# EAGLE board CS3_Schnittstelle_REV0100 (EAGLE 9.5.1)
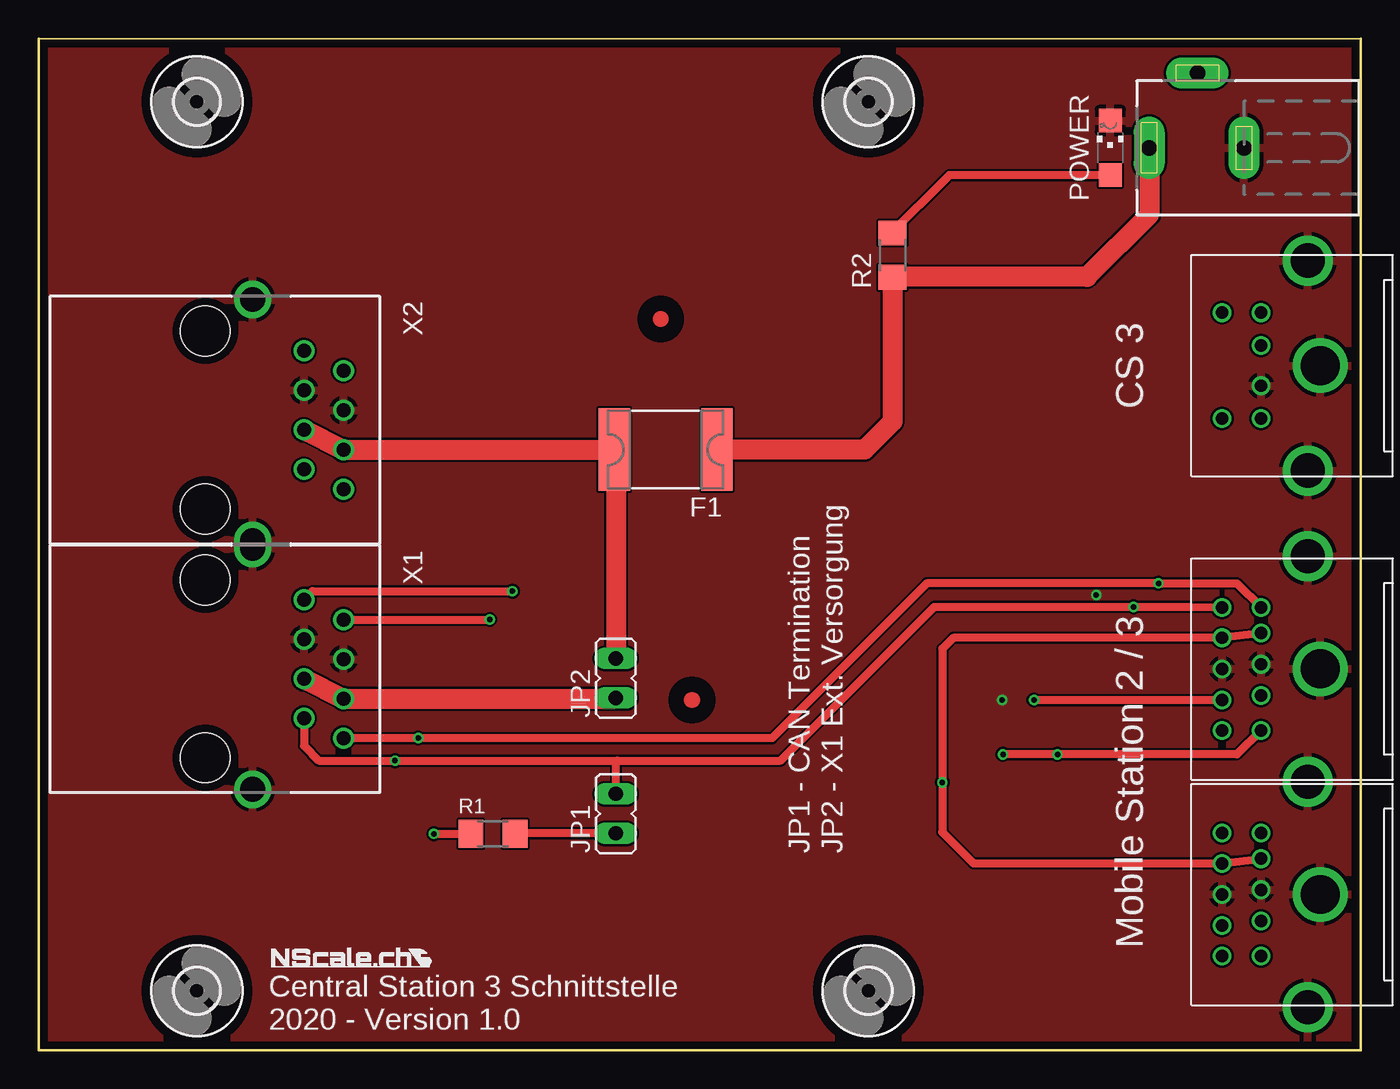
[diagram p0: board, top side]
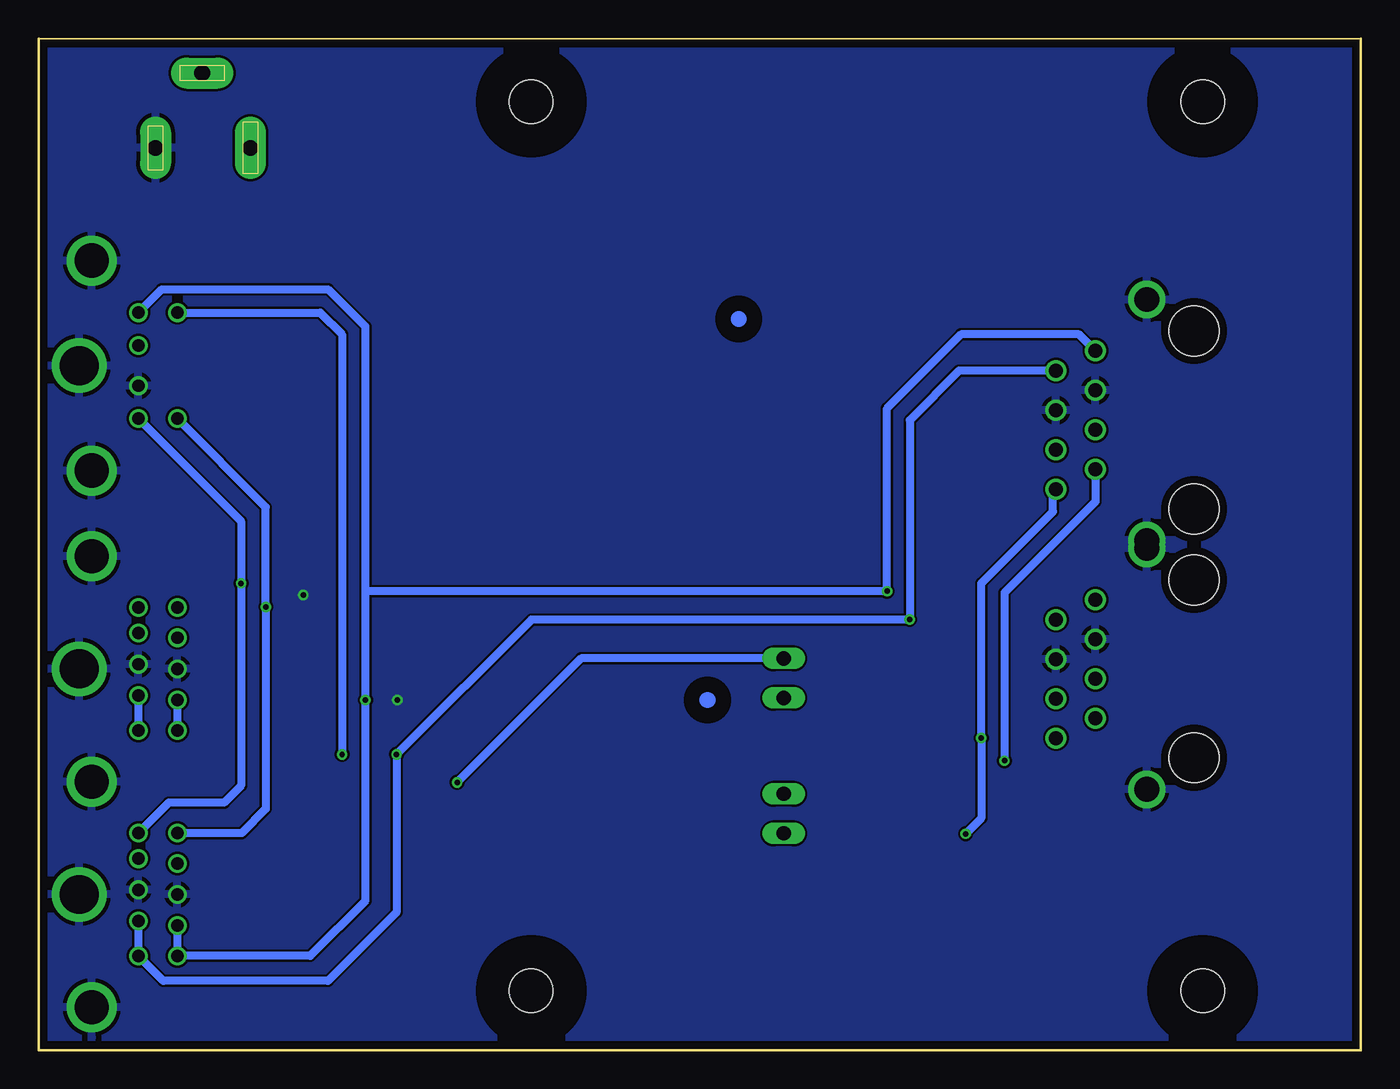
[diagram p1: board, bottom side, seen from below]

Size 85 x 65 mm. Coordinates in mm from the lower left corner, seen from the top.
Outline: 0,0 85,0 85,65 0,65 0,0
Copper layers (1*16): Top 0.035mm / dielectric 1.6mm / Bottom 0.035mm
Design rules "Elecrow_2-layer_PCB_eagle_rule": minimum track width 6mil, minimum drill 12mil, track to track 6mil, track to pad 6mil, pad to pad 6mil, via to via 8mil, smd to smd 0mil, copper to edge 20mil, drill to drill 10mil, minimum pad ring 6mil, minimum via ring 6mil, stop-mask expansion 0mil, vias tented up to drill 100mil, thermal gap 10mil

## Footprints (pad centres in the part's own frame; a part is rotated, then mirrored left to right if it is on the bottom)
2920L = smd 2 x 5.3: 1 -3.3,0; 2 3.3,0
2,8 = hole 2.8: 0,0
DCJ0202 = drill 1 pad 2 long: 1 0,3.1; 2 4.8,0; 3 0,-3
JP1 = drill 0.914 long: 1 0,-1.27; 2 0,1.27
CHIPLED_1206 = smd 1.5 x 1.5: A 0,-1.75; C 0,1.75
R1206 = smd 1.6 x 1.803: 1 -1.422,0; 2 1.422,0
XRJF-01A-0-D2A-010 = drill 0.9 pad 1.27: 1 -4.445,6.35; 2 -3.175,8.89; 3 -1.905,6.35; 4 -0.635,8.89; 5 0.635,6.35; 6 1.905,8.89; 7 3.175,6.35; 8 4.445,8.89 | drill 1.6 pad 2.184: S1 -7.745,3.05; S2 7.745,3.05 | hole 3.2: -5.715,0; 5.715,0
MARKLIN-MD-6-PRINT = drill 0.8 pad 1.1: 1 -1.3,-2; 2 1.3,-2; 3 -3.4,-2; 4 3.4,-2; 5 -3.4,-4.5; 6 3.4,-4.5 | drill 2.5 pad 2.8: GND1 0,1.8 | drill 2.2 pad 2.5: GND2 6.75,1; GND3 -6.75,1
MARKLIN-MD-10-PRINT = drill 0.8 pad 1.1: 1 -2.3,-2; 2 -0.3,-2; 3 3.95,-2; 4 -3.95,-2; 5 -2,-4.5; 6 0,-4.5; 7 1.7,-2; 8 -3.95,-4.5; 9 2,-4.5; 10 3.95,-4.5 | drill 2.5 pad 2.8: GND1 0,1.8 | drill 2.2 pad 2.5: GND2 7.25,1; GND3 -7.25,1

## Placement (x,y rotation side)
F1  Fuse 2A  [2920L]  40.3,38.6 180 top
H1  MOUNT-HOLE2.8  [2,8]  10.16,60.96 0 top
H2  MOUNT-HOLE2.8  [2,8]  53.34,60.96 0 top
H3  MOUNT-HOLE2.8  [2,8]  10.16,3.81 0 top
H4  MOUNT-HOLE2.8  [2,8]  53.34,3.81 0 top
J1  12V  [DCJ0202]  74.5,58 90 top
JP1  [JP1]  37.1,15.2 0 top
JP2  [JP1]  37.1,23.9 0 top
POWER  [CHIPLED_1206]  68.9,58 0 top
R1  120  [R1206]  29.2,13.9 0 top
R2  [R1206]  54.9,51.1 90 top
U$1  [CIRCLE-1MM-3R]  40,47 0 top
U$2  [CIRCLE-1MM-3R]  42,22.5 0 top
X1  MEBP 8-8G  [XRJF-01A-0-D2A-010]  10.7,24.5 270 top
X2  MEBP 8-8G  [XRJF-01A-0-D2A-010]  10.7,40.5 270 top
X3  MARKLIN-MD-6  [MARKLIN-MD-6-PRINT]  80.6,44 270 top
X4  MARKLIN-MD-10  [MARKLIN-MD-10-PRINT]  80.6,10 270 top
X5  MARKLIN-MD-10  [MARKLIN-MD-10-PRINT]  80.6,24.5 270 top

## Library data of the parts
F1 = polyfuse-smd_10; MF: Littelfuse; MPN: 2920L030; OC_FARNELL: 1822222; OC_NEWARK: 18M4789
H1-H4 = holes
J1 = con-jack; OC_FARNELL: unknown; OC_NEWARK: unknown
JP1 JP2 = jumper
POWER = led
R1 R2 = rcl; SPICEPREFIX: R
U$1 U$2 = fiducial
X1 X2 = con-xmultiple-MB
X3-X5 = Marklin-Mini-DIN

## Nets
CANH: R1.1 X1.8 X2.8 X3.4 X4.4 X5.4
CANL: JP1.2 X1.7 X2.7 X3.6 X4.8 X5.8
GND: J1.3 POWER.C X1.3 X1.4 X1.S1 X1.S2 X2.3 X2.4 X2.S1 X2.S2 X3.2 X3.GND1 X3.GND2 X3.GND3 X4.2 X4.6 X4.GND1 X4.GND2 X4.GND3 X5.2 X5.6 X5.GND1 X5.GND2 X5.GND3
GSB: X1.1 X2.1 X3.3 X4.9 X4.10 X5.9 X5.10
GSO: X1.2 X2.2 X3.5 X4.3 X4.7 X5.3 X5.7
N$1: JP2.1 X1.5 X1.6
N$2: JP1.1 R1.2
N$3: POWER.A R2.2
VCC_R: F1.2 JP2.2 X2.5 X2.6 X4.1 X4.5 X5.1 X5.5
VIN: F1.1 J1.1 R2.1

## Tracks (layer width: path | path; a pad name or v marks a point on that pad's centre or on a via)
CANH  (via drill 0.35)
  Top 0.508: v24.4,20.05 X1.8 47.16,20.05 57.1,30 v72,30 77.05,30 X5.4 | v25.4,13.9 R1.1
  Bottom 0.508: X2.8 19.79,35.82 19.79,34.61 24.4,30 v24.4,20.05 24.4,14.9 v25.4,13.9 | X4.4 76.65,15.9 73.1,15.9 72,17 v72,30 72,34 X3.4
CANL  (via drill 0.35)
  Top 0.508: X5.8 74.07,28.48 v70.4,28.48 57.58,28.48 47.7,18.6 37.2,18.6 | 37.2,18.6 v22.9,18.6 18,18.6 17.05,19.55 X1.7 | JP1.2 37.1,18.5 37.2,18.6
  Bottom 0.508: X4.8 71.95,13.95 70.4,15.5 v70.4,28.48 70.4,34.9 X3.6 | v22.9,18.6 22.9,29.4 17.05,35.25 X2.7
GND  (via drill 0.35)
  other vias: 61.95,22.5 68,29.25
  pour Top: -5,70 90,70 90,-5 -5,-5
  pour Bottom: -10,75 95,75 95,-10 -10,-10
GSB  (via drill 0.35)
  Top 0.508: X1.1 17.61,29.5 v30.45,29.5 | X5.9 v64,22.5
  Bottom 0.508: X4.9 X4.10 67.55,6.05 64,9.6 v64,22.5 64,29.5 | X5.9 X5.10 | 64,29.5 64,46.5 66.4,48.9 77.1,48.9 X3.3 | 64,29.5 v30.45,29.5 30.45,41.25 25.7,46 18.11,46 X2.1
GSO  (via drill 0.35)
  Top 0.508: X1.2 v29,27.68 | v62,19 v65.5,19 77.05,19 X5.3
  Bottom 0.508: X4.7 X4.3 77,4.45 66.4,4.45 62,8.85 v62,19 53.33,27.68 v29,27.68 29,40.5 25.82,43.67 X2.2 | X5.7 X5.3 | X3.5 66.9,47.4 65.5,46 v65.5,19
N$1
  Top 1.27: JP2.1 37.06,22.59 X1.6 X1.5
N$2
  Top 0.508: JP1.1 30.77,13.93 R1.2
N$3
  Top 0.508: POWER.A 58.55,56.25 54.5,52.2 54.58,52.2 R2.2
VCC_R  (via drill 0.35)
  Top 0.508: X4.1 X4.5 60.1,12 58.1,14 v58.1,17.2 58.1,25.8 58.8,26.5 X5.5 X5.1
  Top 1.27: JP2.2 37.1,38.5 F1.2 X2.6 X2.5
  Bottom 0.508: JP2.2 50.13,25.17 v58.1,17.2
VIN
  Top 1.27: J1.1 71.4,53.7 67.4,49.7 54.92,49.7 R2.1 54.9,40.4 53.1,38.6 F1.1

## Text on the board
tPlace: C:/Users/Patrik Laube/Pictures/logo_sw.bmp
tNames: CS 3 | Mobile Station 2 / 3 | JP1 - CAN Termination / JP2 - X1 Ext. Versorgung | Central Station 3 Schnittstelle / 2020 - Version 1.0